# EAGLE board ILX544A_V1_B1 (EAGLE 7.0.0)
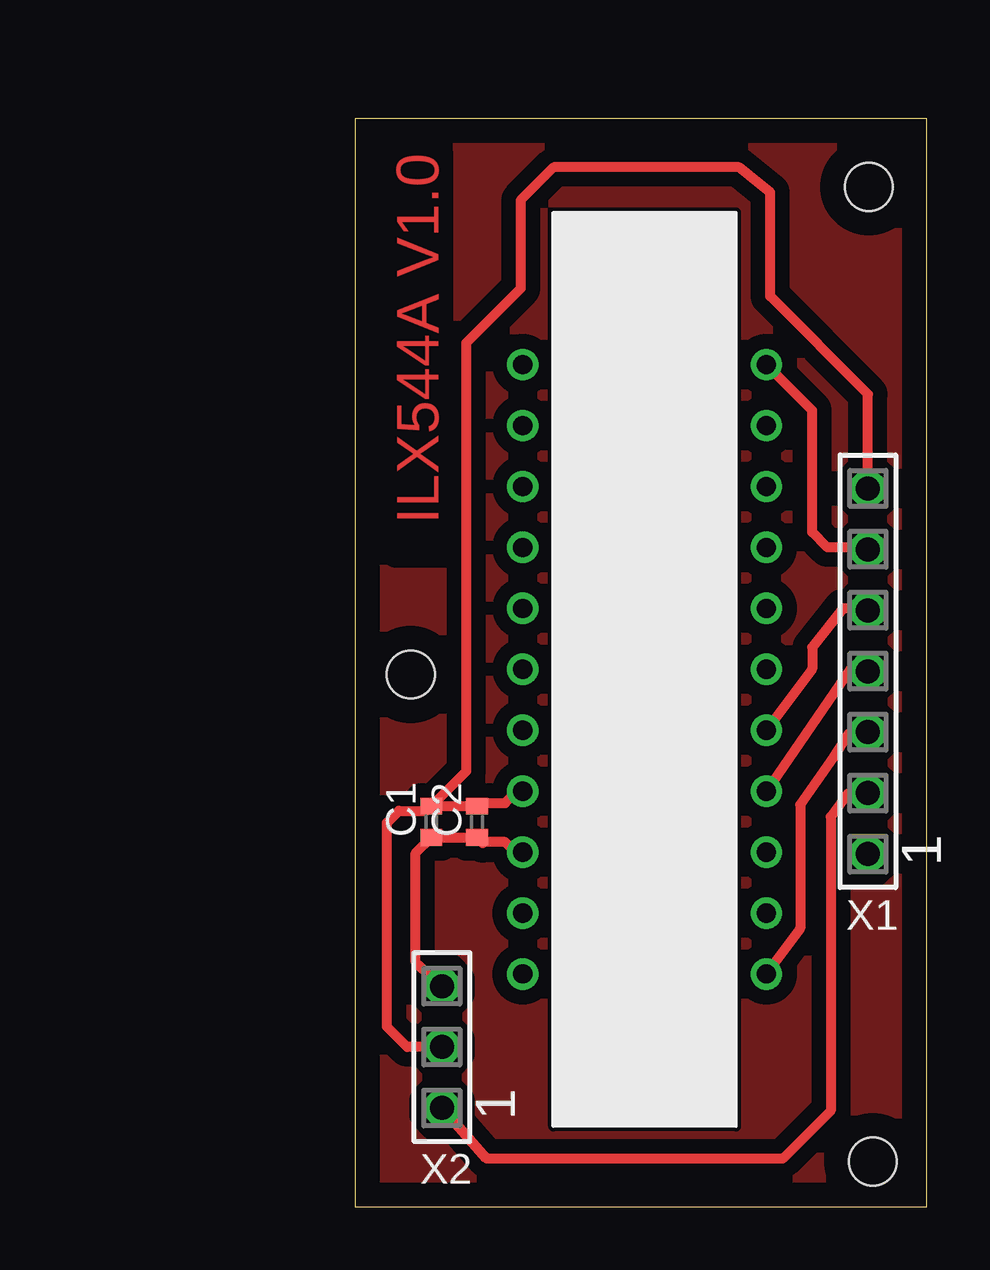
[diagram p0: board, top side]
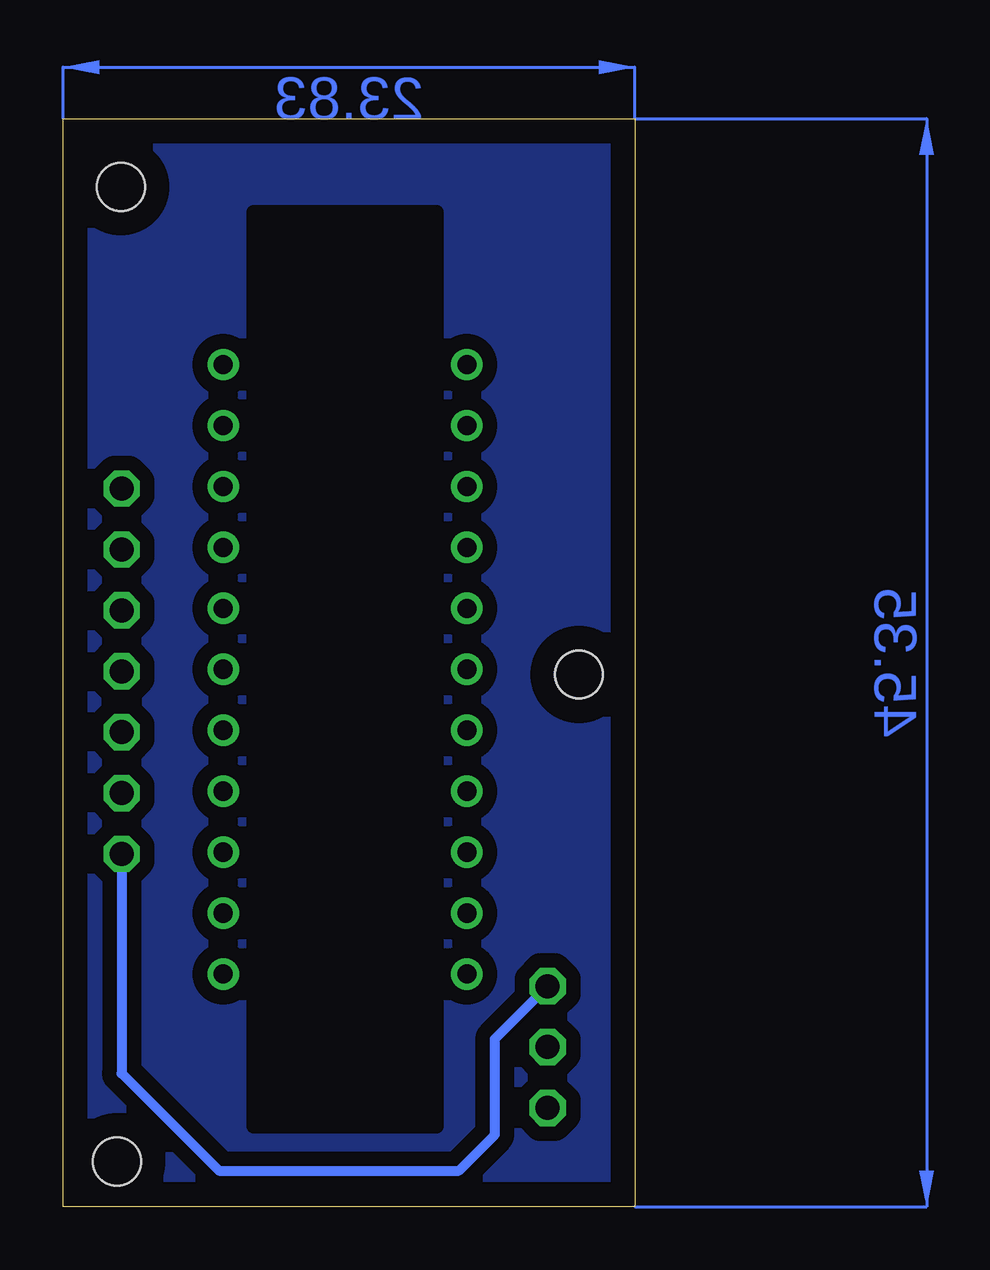
[diagram p1: board, bottom side, seen from below]

Size 23.83 x 45.35 mm. Coordinates in mm from the lower left corner, seen from the top.
Outline: 0,0 23.83,0 23.83,45.35 0,45.35 0,0
Copper layers (1*16): Top 0.035mm / dielectric 1.5mm / Bottom 0.035mm
Design rules "default": minimum track width 10mil, minimum drill 24mil, track to track 8mil, track to pad 8mil, pad to pad 8mil, via to via 8mil, smd to smd 8mil, copper to edge 40mil, drill to drill 8mil, minimum pad ring 10mil, minimum via ring 8mil, stop-mask expansion 4mil, vias tented up to drill 0mil, thermal gap 10mil
Holes 2 mm at 21.59,1.88 2.33,22.18 21.43,42.51

## Footprints (pad centres in the part's own frame; a part is rotated, then mirrored left to right if it is on the bottom)
C0402 = smd 0.7 x 0.9: 1 -0.65,0; 2 0.65,0
ILX544A = drill 0.8: P$1 -12.7,7.62; P$2 -12.7,5.08; P$3 -12.7,2.54; P$4 -12.7,0; P$5 -12.7,-2.54; P$6 -12.7,-5.08; P$7 -12.7,-7.62; P$8 -12.7,-10.16; P$9 -12.7,-12.7; P$10 -12.7,-15.24; P$11 -12.7,-17.78; P$12 -2.54,-17.78; P$13 -2.54,-15.24; P$14 -2.54,-12.7; P$15 -2.54,-10.16; P$16 -2.54,-7.62; P$17 -2.54,-5.08; P$18 -2.54,-2.54; P$19 -2.54,0; P$20 -2.54,2.54; P$21 -2.54,5.08; P$22 -2.54,7.62
SSW-107-02-S-S = drill 1 pad 1.5 octagon: 1 -7.62,0; 2 -5.08,0; 3 -2.54,0; 4 0,0; 5 2.54,0; 6 5.08,0; 7 7.62,0
SSW-103-02-S-S = drill 1 pad 1.5 octagon: 1 -2.54,0; 2 0,0; 3 2.54,0

## Placement (x,y rotation side)
C1  0.01uF  [C0402]  3.18,16.05 90 top
C2  0.01uF  [C0402]  5.09,16.05 90 top
U$1  CCD1  [ILX544A]  4.46,17.32 180 top
X1  SSW-107-02-S-S  [SSW-107-02-S-S]  21.39,22.32 90 top
X2  SSW-103-02-S-S  [SSW-103-02-S-S]  3.63,6.65 90 top

## Library data of the parts
C1 C2 = eagle-ltspice; SPICEMODEL: NONE; SPICEPREFIX: C
U$1 = ILX544A
X1 = con-samtec; MPN: SSW-107-02-S-S; OC_FARNELL: unknown; OC_NEWARK: 11P9433
X2 = con-samtec; MPN: SSW-103-02-S-S; OC_FARNELL: unknown; OC_NEWARK: 11P9367

## Nets
N$1: U$1.P$5 X1.5
N$3: U$1.P$1 X1.3
N$4: U$1.P$4 X1.4
N$5: C1.1 C2.1 U$1.P$20 X1.1 X2.3
N$6: U$1.P$11 X1.6
N$14: X1.2 X2.1
N$15: C1.2 C2.2 U$1.P$19 X1.7 X2.2

## Tracks (layer width: path | path; a pad name or v marks a point on that pad's centre or on a via)
N$1
  Top 0.406: X1.5 21.31,24.94 20.35,24.94 19.06,23.33 19.06,22.41 U$1.P$5
N$2
  cutout Top: 8.27,41.45 15.89,41.45 15.89,3.35 8.27,3.35
N$3
  Top 0.406: X1.3 20.59,19.73 19.95,18.73 18.56,16.77 18.56,11.61 U$1.P$1
N$4
  Top 0.406: X1.4 21.31,22.4 20.67,22.4 20.67,22.43 U$1.P$4
N$5
  Top 0.406: U$1.P$20 6.68,14.78 6.26,15.2 5.29,15.2 C2.1 | C2.1 C1.1 2.53,14.75 2.53,10.2 X2.3 | 5.33,15.16 C2.1
  Bottom 0.406: X1.1 21.39,5.55 17.34,1.5 7.33,1.5 5.83,3 5.83,6.99 X2.3
N$6
  Top 0.406: X1.6 21.31,27.48 19.7,27.48 19.06,28.11 19.06,33.2 U$1.P$11
N$7
  cutout Bottom: 8.27,41.45 15.89,41.45 15.89,3.35 8.27,3.35
N$14
  Top 0.406: X1.2 20.57,17.24 19.84,16.25 19.84,4 17.84,2 5.5,2 X2.1
N$15
  Top 0.406: C1.2 C2.2 5.22,16.82 6.26,16.82 6.75,17.32 U$1.P$19 | X1.7 21.39,33.87 17.31,37.95 17.31,42.27 16.01,43.33 8.29,43.33 6.91,41.95 6.91,38.27 4.63,36 4.63,18.15 C1.2 | X2.2 2.18,6.65 1.33,7.5 1.33,16 1.83,16.5 2.99,16.5 C1.2
N$16
  pour Top (isolate 0.61): 0.61,44.92 23.3,44.92 23.47,0.61 0.61,0.61
N$17
  pour Bottom (isolate 0.61): 0.41,44.98 23.48,44.98 23.48,0.65 0.41,0.65
(copper drawn outside any net)
  shapes: Bottom area x2

## Text on the board
Top: ILX544A V1.0